# Altium PCB Beethoven-Clock_LED-PCB.PcbDoc
Units mm, origin at the board's own origin, x right, y up, seen from the top; angles counter-clockwise.
Board outline 19.1 x 12.2 mm, 2 copper layers (Top Layer, Bottom Layer); 24 components, 41 nets, 110 pads, 38 vias.
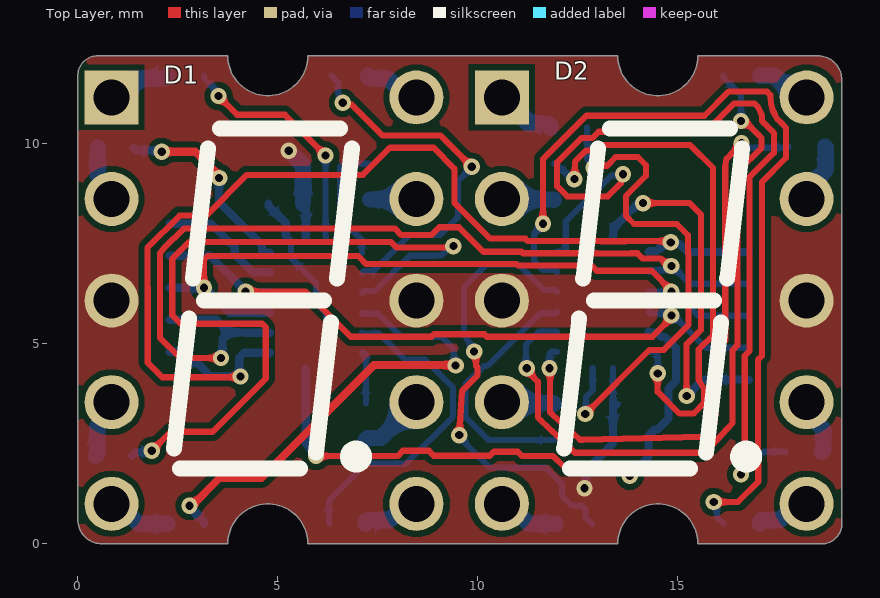
[diagram p0: Top Layer view]
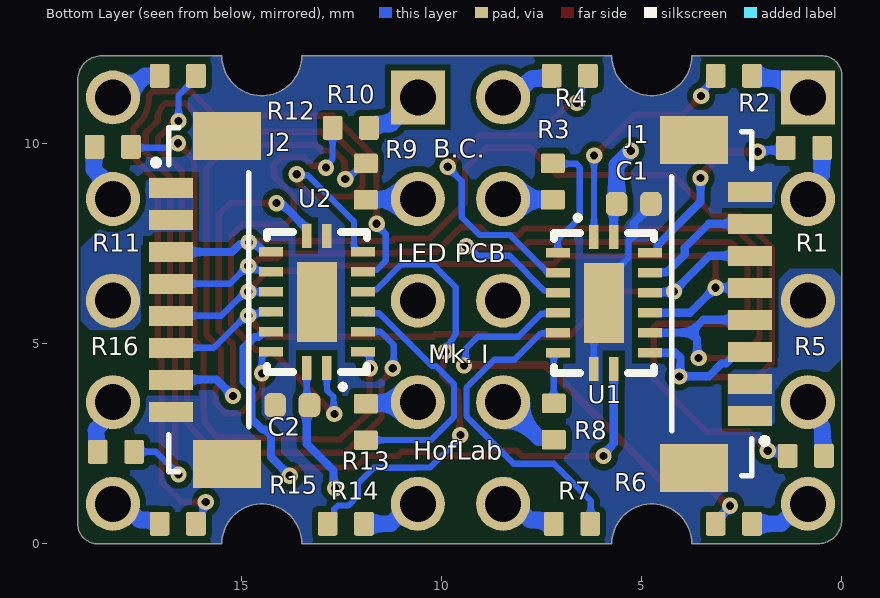
[diagram p1: Bottom Layer view, seen from below]
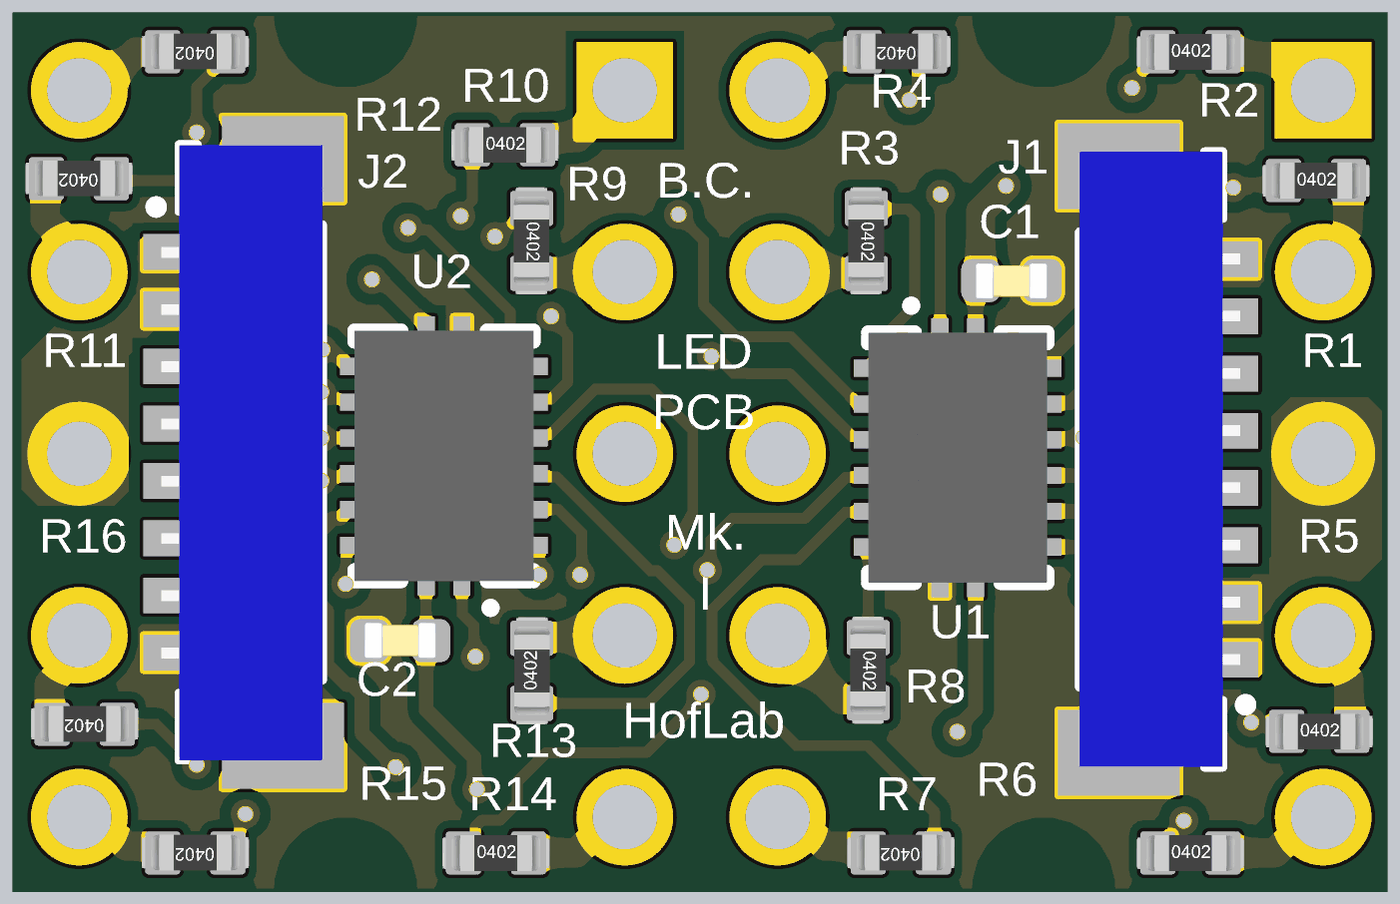
[diagram p2: 3D render of the assembled board from below, using the file's embedded part models]

## Layer stack, top to bottom
Top Solder: solder mask 0.0102, Solder Resist, Dk 3.5
Top Layer: signal copper 0.0356
Dielectric 1: dielectric 0.32, FR-4, Dk 4.8
Bottom Layer: signal copper 0.0356
Bottom Solder: solder mask 0.0102, Solder Resist, Dk 3.5

## Board outline
0.6,0 3.75,0 cw(c4.75,0) 5.75,0 13.5,0 cw(c14.5,0) 15.5,0 18.6,0 ccw(c18.6,0.5) 19.1,0.5 19.1,11.6 ccw(c18.5,11.6) 18.5,12.2 15.5,12.2 cw(c14.5,12.2) 13.5,12.2 5.75,12.2 cw(c4.75,12.2) 3.75,12.2 0.5,12.2 ccw(c0.5,11.7) 0,11.7 0,0.6 ccw(c0.6,0.6)

## Design rules (kind name [scope] priority, off if disabled: settings)
Clearance [All] p1: gap=0.152 ignorepadtopadclearanceinfootprint=FALSE except(0: Arc-Hole Track-Hole SMDPad-Hole THPad-Hole Via-Hole Fill-Hole Poly-Hole Region-Hole Text-Hole; 0.22: SMDPad-SMDPad SMDPad-THPad THPad-THPad)
MinimumSolderMaskSliver [All] p1: minsoldermaskwidth=0.12
PolygonConnect [All] p1: connectstyle=Direct reliefconductorwidth=0.254 reliefentries=4 polygonreliefangle="90 Angle" airgapwidth=0.152
RoutingVias [All] p1: holewidth=0.203 width=0.406 viastyle="Through Hole" minholewidth=0.203 minwidth=0.406 maxholewidth=0.711 maxwidth=1.27
SilkToSolderMaskClearance [IsPad] p1: minsilkscreentomaskgap=0.102 clearancetoexposedcopper=TRUE
SolderMaskExpansion Vias [IsVia] p1: expansion=0.102 istentingtop=TRUE
SolderMaskExpansion SolderMaskExpansion_1 [All] p2: expansion=0.051 istentingtop=FALSE
Width [All] p1: maxlimit=0.406 minlimit=0.152 preferedwidth=0.203 minimp=50.000000 maximp=50.000000 favimp=50.000000
28 further rules are at their usual default settings.

## Components (designator, comment, footprint, x,y, rotation, side; value= is the part's Value field where it differs from the comment)
C1 "CAP" 0402C 5.2,8.5 r180 bottom
C2 "CAP" 0402C 13.737,3.466 r0 bottom
D1 "HDSP-301E" 10-DIP_7SEG 4.655,6.08 r0 top locked
D2 "HDSP-301E" 10-DIP_7SEG 14.41,6.08 r0 top locked
J1 "BM08B-SURS-TF" JST_BM08B-SURS-TF(LF)(SN) 3,6 r90 bottom
J2 "BM08B-SURS-TF" JST_BM08B-SURS-TF(LF)(SN) 16.075,6.1 r270 bottom locked
R1 "RES" 0402R 0.945,9.9 r180 bottom value=383
R2 "RES" 0402R 2.7,11.7 r180 bottom value=383
R3 "RES" 0402R 7.225,9.055 r270 bottom value=383
R4 "RES" 0402R 6.8,11.7 r0 bottom value=383
R5 "RES" 0402R 0.9,2.2 r180 bottom value=383
R6 "RES" 0402R 2.7,0.5 r180 bottom value=383
R7 "RES" 0402R 6.745,0.5 r0 bottom value=383
R8 "RES" 0402R 7.2,3.055 r270 bottom value=383
R9 "RES" 0402R 11.9,9.055 r270 bottom value=383
R10 "RES" 0402R 12.275,10.4 r180 bottom value=383
R11 "RES" 0402R 18.225,9.925 r0 bottom value=383
R12 "RES" 0402R 16.6,11.7 r0 bottom value=383
R13 "RES" 0402R 11.9,3.045 r90 bottom value=383
R14 "RES" 0402R 12.4,0.5 r180 bottom value=383
R15 "RES" 0402R 16.6,0.5 r0 bottom value=383
R16 "RES" 0402R 18.145,2.3 r0 bottom value=383
U1 "74HC595TBQ,115" 16-VFQN-EP 5.95,6.025 r270 bottom locked
U2 "74HC595TBQ,115" 16-VFQN-EP 13.125,6.05 r90 bottom locked

## Footprints (in the part's own frame and the unit in brackets; to place one, negate y for a bottom-side part, rotate by r counter-clockwise, add the part's x,y. Pads: shape width x height; smd on the part's side, far side on the other; paste and mask are expansions set on the pad)
10-DIP_7SEG [mm]
  rect 1.35x1.35 / inner round 1.35 / far side rect 1.35x1.35 hole 0.9: 1(-3.81,5.08)
  round 1.35 hole 0.9: 2(-3.81,2.54) 3(-3.81,0) 4(-3.81,-2.54) 5(-3.81,-5.08) 6(3.81,-5.08) 7(3.81,-2.54) 8(3.81,0) 9(3.81,2.54) 10(3.81,5.08)
  silkscreen extent -2.25,-4.2 2.5,4.3, body extent -4.85,-6.4 4.85,6.4, height 6.4
16-VFQN-EP [mm]
  rect 0.6x0.24 smd mask+0.051: 1(-1.65,-0.25) 8(1.65,-0.25) 9(1.65,0.25) 16(-1.65,0.25)
  rect 0.24x0.6 smd mask+0.051: 2(-1.25,-1.15) 3(-0.75,-1.15) 4(-0.25,-1.15) 5(0.25,-1.15) 6(0.75,-1.15) 7(1.25,-1.15) 10(1.25,1.15) 11(0.75,1.15) 12(0.25,1.15) 13(-0.25,1.15) 14(-0.75,1.15) 15(-1.25,1.15)
  rect 2x1 smd mask+0.051: 17(0,0)
  silkscreen extent -2.18,-1.25 1.75,1.25, body extent -1.75,-1.25 1.75,1.25, height 0.85
0402C [mm] "0402 SMT Capacitor"
  rrect53% 0.54x0.6 smd: 1(-0.43,0) 2(0.43,0)
  body extent -0.5,-0.25 0.5,0.25, height 0.5
0402R [mm] "0402 SMT Resistor"
  rrect20% 0.49x0.6 smd: 1(-0.455,0) 2(0.455,0)
  body extent -0.75,-0.25 0.75,0.25, height 0.35
JST_BM08B-SURS-TF(LF)(SN) [mm]
  rect 0.5x1.1 smd mask+0.05: 1(-2.8,-0.7) 2(-2,-0.7) 3(-1.2,-0.7) 4(-0.4,-0.7) 5(0.4,-0.7) 6(1.2,-0.7) 7(2,-0.7) 8(2.8,-0.7)
  rect 1.2x1.7 smd mask+0.05: SH(-4.1,0.7) SH(4.1,0.7)
  silkscreen extent -4.3,-1.12 4.3,1.25, body extent -4.3,-1 4.3,1.25, height 2.75

## Part data
C1 C2: "Capacitor", Type=SMD
D1 D2: library part "7SEG SINGLE TH", "DISPLAY 7-SEG 0.4\" SGL RED 10DIP", MFR="Broadcom Limited", MFR PN=HDSP-301E, Type=TH
J1 J2: library part "CONN 8POS 0.8MM PITCH", "CONN HEADER SMD 8POS 0.8MM", MFR=JST, MFR PN=BM08B-SURS-TF, Type=SMD
R1 R2 R3 R4 R5 R6 R7 R8 R9 R10 R11 R12 R13 R14 R15 R16: "Resistor", MFR=YAGEO, MFR PN=RC0402FR-07383RL
U1 U2: library part "SHIFT REG 8BIT QFN", "IC 8BIT SHIFT REGISTER 16-DHVQFN", MFR="Nexperia USA Inc.", MFR PN=74HCT595BQ,115, Package=QFN, Type=SMD

## Via types
v1: diameter 0.406, hole 0.203, Top Layer to Bottom Layer, tented both sides, 38 vias

## Nets (pads, with @x,y where several pads share a name; then routed paths per layer and width w, separated by ;. In a path a pad name is that pad's centre, name@x,y a point inside that pad or via, vN(x,y) a via of type N, cw(c..) or ccw(c..) an arc to the next point about the centre after c; other vN are vias at no path point)
DIG1_A: D1.10 R4.2 | length 1.4
  Bottom Layer w0.406: R4.2 7.255,11.676 7.297,11.635 7.755,11.635 8.23,11.16 D1.10
DIG1_B: D1.9 R3.2 | length 1.2
  Bottom Layer w0.254: R3.2@7.3,8.6 R3.2@7.31,8.61 ; D1.9@8.455,8.61 D1.9
  Bottom Layer w0.406: R3.2@7.31,8.61 D1.9@8.455,8.61
DIG1_C: D1.7 R8.2 | length 1.7
  Bottom Layer w0.406: R8.2 7.242,2.642 7.567,2.642 D1.7
DIG1_D: D1.5 R6.2 | length 1.6
  Bottom Layer w0.406: D1.5 1.019,1 1.519,0.5 R6.2
DIG1_DP: D1.6 R7.2 | length 1.5
  Bottom Layer w0.406: R7.2 7.2,0.555 7.242,0.597 7.806,0.597 8.21,1 D1.6
DIG1_E: D1.4 R5.2 | length 1.5
  Bottom Layer w0.406: R5.2 0.487,2.242 0.487,2.926 0.845,3.285 D1.4
DIG1_F: D1.2 R1.2 | length 1.4
  Bottom Layer w0.406: R1.2 0.5,9.89 0.5,9.22 0.845,8.875 D1.2
DIG1_G: D1.1 R2.2 | length 1.6
  Bottom Layer w0.406: D1.1 1.317,11.632 2.203,11.632 2.245,11.674 R2.2
DIG2_A: D2.10 R12.2 | length 1.4
  Bottom Layer w0.406: R12.2 17.425,11.7 17.965,11.16 D2.10
DIG2_B: D2.9 R11.2 | length 1.5
  Bottom Layer w0.406: D2.9 18.22,8.875 18.7,9.355 18.7,9.905 R11.2
DIG2_C: D2.7 R16.2 | length 1.4
  Bottom Layer w0.406: D2.7 18.22,3.285 18.642,2.863 18.642,2.342 R16.2
DIG2_D: D2.5 R14.2 | length 1.6
  Bottom Layer w0.406: D2.5 10.774,1 11.274,0.5 R14.2
DIG2_DP: D2.6 R15.2 | length 1.4
  Bottom Layer w0.406: R15.2 17.055,0.555 17.097,0.597 17.561,0.597 17.965,1 D2.6
DIG2_E: D2.4 R13.2 | length 1.3
  Bottom Layer w0.406: D2.4 10.62,3.52 11.88,3.52 R13.2
DIG2_F: D2.2 R9.2 | length 1.3
  Bottom Layer w0.406: D2.2 10.61,8.61 11.89,8.61 R9.2
DIG2_G: D2.1 R10.2 | length 1.6
  Bottom Layer w0.406: D2.1 11.263,10.497 11.778,10.497 11.82,10.455 R10.2
GND: C1.2 C2.2 J1.8 J1.SH J2.8 J2.SH U1.8 U1.17 U2.8 U2.17 | length 4.7
  Bottom Layer w0.152: 5.2,7.7 5.329,7.571 5.329,7.146 5.95,6.525 U1.17 6.2,5.775 U1.8
  Bottom Layer w0.203: C1.2 4.77,8.448 5.2,8.018 5.2,7.7
NetJ2_7: J2.7 U2.9 | length 9.2
  Top Layer w0.153: v1(14.132,8.516) 15.294,8.516 15.576,8.235 15.576,5.344 15.494,5.262 15.297,5.065 15.263,5.032 15.219,4.987 15.219,3.969 v1(15.222,3.692)
  Bottom Layer w0.203: U2.9 13.393,7.718 13.393,7.898 13.972,8.477 14.093,8.477 v1(14.132,8.516) ; v1(15.222,3.692) 15.633,4.103 16.772,4.103 J2.7
NetR1_1: R1.1 U1.15 | length 5.2
  Top Layer w0.203: v1(2.1,9.8) 2.937,9.8 3.207,9.53 3.207,9.526 3.534,9.2 v1(3.534,9.145)
  Bottom Layer w0.203: R1.1 1.461,9.839 2.061,9.839 v1(2.1,9.8) v1@1.9,9.8 ; v1(3.534,9.145) 3.534,8.541 4.602,7.473 4.602,7.293 4.62,7.275 U1.15
NetR2_1: R2.1 U1.1 | length 5.9
  Top Layer w0.152: v1(3.516,11.192) 3.983,10.725 5.175,10.725 6.191,9.709 v1(6.191,9.705)
  Bottom Layer w0.152: R2.1 3.155,11.645 v1@3.5,11.3 ; v1(6.191,9.705) 6.195,9.7 6.195,7.68 U1.1
NetR3_1: R3.1 U1.2 | length 3.1
  Bottom Layer w0.152: U1.2 7.1,7.6 6.55,8.15 6.55,9.411 6.639,9.5 7.265,9.5 R3.1@7.275,9.51
NetR4_1: R4.1 U1.3 | length 9
  Top Layer w0.152: v1(6.625,11.025) 6.674,10.976 6.849,10.976 7.62,10.205 9.07,10.205 v1(9.85,9.425)
  Bottom Layer w0.152: R4.1 6.514,11.531 6.514,11.205 6.625,11.094 v1(6.625,11.025) ; U1.3 7.144,6.819 7.387,6.819 8.285,7.716 9.053,7.716 9.5,8.163 9.5,9.061 v1@9.85,9.411
NetR5_1: R5.1 U1.4 | length 19.3
  Top Layer w0.153: v1(1.85,2.325) 2.324,2.8 3.372,2.8 4.7,4.128 4.7,5.41 4.61,5.5 2.575,5.5 2.36,5.715 2.36,7.122 2.786,7.547 7.827,7.547 7.964,7.411 9.358,7.411 v1(9.389,7.441)
  Bottom Layer w0.152: U1.4 7.144,6.319 7.421,6.319 8.302,7.2 8.9,7.2 8.906,7.206 9.085,7.206 9.32,7.441 v1(9.389,7.441)
  Bottom Layer w0.203: R5.1 1.442,2.287 1.811,2.287 v1(1.85,2.325)
NetR6_1: R6.1 U1.5 | length 11.8
  Top Layer w0.203: v1(2.793,0.949) 2.848,0.949 3.549,1.65 4.588,1.65 7.407,4.469 9.432,4.469 v1(9.447,4.454)
  Bottom Layer w0.152: U1.5 7.125,5.75 7.514,5.75 8.087,5.176 9.098,5.176 9.398,4.876 9.398,4.503 v1(9.447,4.454)
  Bottom Layer w0.203: v1(2.793,0.949) 2.793,0.917 3.155,0.555 R6.1
NetR7_1: R7.1 U1.6 | length 8.1
  Bottom Layer w0.152: R7.1 6.275,0.515 6.275,1.075 7.2,2 8.203,2 9.369,3.166 9.369,3.194 9.383,3.209 9.383,3.9 8.683,4.6 8.185,4.6 7.524,5.261 7.114,5.261 U1.6
NetR8_1: R8.1 U1.7 | length 1.3
  Bottom Layer w0.152: U1.7 7.156,4.775 7.2,4.731 R8.1
NetR9_1: R9.1 U2.15 | length 13.7
  Top Layer w0.152: v1(12.414,9.115) 12.426,9.128 12.426,9.547 12.714,9.835 13.02,9.835 13.159,9.974 15.301,9.974 15.881,9.394 15.881,5.218 15.524,4.861 15.524,4.096 15.654,3.871 15.654,3.513 15.397,3.257 15.04,3.257 14.497,3.799 v1(14.497,4.261)
  Bottom Layer w0.152: R9.1 11.955,9.51 12.35,9.115 v1(12.414,9.115) ; U2.15 14.453,4.8 14.497,4.756 v1(14.497,4.261)
NetR10_1: R10.1 U2.1 | length 12.8
  Top Layer w0.152: v1(12.686,3.244) 14.292,4.849 14.649,4.849 15.271,5.471 15.271,7.237 15.255,7.253 15.255,7.714 14.974,7.995 13.905,7.995 13.7,8.2 13.7,8.695 14.2,9.195 14.2,9.469 14,9.669 13.448,9.669 13.231,9.452 12.941,9.452 v1(12.893,9.403)
  Bottom Layer w0.152: v1(12.686,3.244) 12.707,3.264 12.707,3.675 12.872,3.841 U2.1@12.872,4.397 ; R10.1 12.73,9.62 12.893,9.457 v1(12.893,9.403)
NetR11_1: R11.1 U2.2 | length 14.7
  Top Layer w0.152: v1(11.795,4.388) 11.808,4.375 11.808,3.287 11.855,3.24 12.555,2.6 12.616,2.6 12.618,2.6 15.627,2.676 15.676,2.725 15.681,2.731 15.921,3.026 15.959,3.387 15.959,3.997 15.955,4.729 15.955,4.855 16,4.9 16.186,5.086 16.186,9.423 16.222,9.628 v1(16.592,10.013)
  Bottom Layer w0.152: v1(11.795,4.388) 11.795,4.756 11.838,4.8 U2.2 ; v1(16.592,10.013) 16.661,10.013 16.774,9.9 17.745,9.9 R11.1
NetR12_1: R12.1 U2.3 | length 17.8
  Top Layer w0.152: v1(11.225,4.388) 11.225,4.335 11.504,4.056 11.504,3.22 11.504,3.157 11.593,3.068 11.729,2.935 12.425,2.275 12.488,2.275 15.563,2.275 15.626,2.275 15.797,2.414 15.981,2.599 16.369,3.018 16.369,4.838 16.49,4.959 16.49,9.296 17.096,9.902 17.096,10.144 17.013,10.227 16.76,10.48 16.74,10.48 16.649,10.572 v1(16.58,10.572)
  Bottom Layer w0.152: v1(11.225,4.388) 11.2,4.413 11.2,4.971 11.529,5.3 U2.3 ; R12.1 16.145,11.645 16.58,11.21 v1(16.58,10.572)
NetR13_1: R13.1 U2.4 | length 6.3
  Bottom Layer w0.152: R13.1 10.272,2.59 9.696,3.166 9.696,3.996 10.144,4.444 10.241,4.444 10.8,5.002 11.554,5.756 11.931,5.756 U2.4
NetR14_1: R14.1 U2.5 | length 11.4
  Top Layer w0.152: v1(9.535,2.716) 9.6,3.818 9.645,3.863 9.996,4.214 9.996,4.411 9.957,4.45 9.957,4.757 v1(9.908,4.806)
  Bottom Layer w0.152: v1(9.535,2.716) 9.78,2.42 9.869,2.331 10.296,1.904 10.677,1.904 10.681,1.9 11.7,1.9 12.1,1.5 12.1,1.2 12.344,0.956 12.598,0.956 12.687,0.867 12.687,0.668 R14.1 ; v1(9.908,4.806) 9.651,5.26 9.651,6.409 10.226,6.984 11.016,6.984 11.656,6.344 11.931,6.344 U2.5
NetR15_1: R15.1 U2.6 | length 21.8
  Top Layer w0.152: v1(11.629,8) 11.629,9.612 12.717,10.7 15.667,10.7 16.275,11.308 17.227,11.308 17.316,11.219 17.316,11.16 ccw(c18.22,11.16) 17.43,10.721 17.492,10.61 17.581,10.521 17.705,10.397 17.705,9.649 17.1,9.044 17.1,4.695 17.003,4.597 17.003,2.008 17.012,1.999 17.012,1.554 16.503,1.045 v1(15.9,1.045)
  Bottom Layer w0.152: v1(11.629,8) 11.629,7.969 11.4,7.74 11.4,7.076 11.632,6.844 11.931,6.844 U2.6 ; v1(15.9,1.045) 15.9,0.976 15.976,0.9 15.976,0.669 R15.1
NetR16_1: R16.1 U2.7 | length 22.2
  Top Layer w0.152: v1(13.627,9.238) 13.578,9.189 13.578,9.009 13.491,8.922 13.254,8.685 12.594,8.685 12.593,8.684 12.235,8.684 11.982,8.937 11.982,9.534 12.588,10.14 12.859,10.14 13.019,10.3 15.698,10.3 16.401,11.003 16.92,11.003 17.009,10.915 17.079,10.761 ccw(c18.22,11.16) 17.1,10.706 17.1,10.571 17.145,10.526 17.4,10.271 17.4,9.775 16.795,9.17 16.795,4.821 16.674,4.7 16.674,1.895 16.58,1.802 v1(16.58,1.733)
  Bottom Layer w0.152: U2.7 12.155,7.3 12.199,7.344 12.199,8.059 13.349,9.209 13.599,9.209 v1(13.627,9.238) ; v1(16.58,1.733) 17.147,2.3 R16.1
NetU1_9: U1.9 U2.14 | length 15.1
  Top Layer w0.153: v1(5.956,2.194) 7.994,2.194 8.125,2.325 8.775,2.325 8.9,2.2 10.3,2.2 10.4,2.3 11,2.3 11.106,2.194 11.881,2.194 12.168,1.907 13.584,1.907 13.783,1.708 v1@13.792,1.708
  Bottom Layer w0.203: U1.9 5.7,2.505 5.956,2.249 v1(5.956,2.194) ; v1(13.8,1.7) 14.271,2.171 14.271,2.705 14.42,2.854 14.488,2.854 14.765,3.131 14.765,3.882 14.954,4.071 14.954,4.9 14.68,5.174 14.581,5.174 14.473,5.282 14.293,5.282 U2.14
SHIFT_DATA_CLK: J1.4 J2.4 U1.11 U2.11 | length 23.4
  Top Layer w0.153: v1(3.578,4.644) 2.556,4.644 2.054,5.146 2.054,7.27 2.142,7.371 2.657,7.887 7.92,7.887 8.091,7.716 8.839,7.716 9.037,7.913 9.527,7.913 10.139,7.302 11.088,7.302 11.127,7.263 12.963,7.263 12.968,7.258 13.832,7.258 13.837,7.263 13.989,7.263 14.121,7.131 14.57,7.131 14.671,7.03 14.705,7.03 14.793,6.942 v1(14.839,6.942)
  Bottom Layer w0.152: U2.11 14.319,6.844 v1@14.692,6.844 ; v1@14.85,6.955 15.304,6.5 J2.4
  Bottom Layer w0.203: J1.4 3.464,5.6 3.782,5.282 ; v1(3.578,4.644) 3.617,4.683 3.617,5.117 3.782,5.282 ; U1.11 4.195,5.275 4.188,5.282 3.782,5.282
SHIFT_DATA_IN: J1.7 U1.14 | length 3.1
  Bottom Layer w0.203: J1.7 3.325,8 3.925,7.4 3.925,7.235 4.366,6.793 4.782,6.793 U1.14
SHIFT_nMCLR: J1.3 J2.3 U1.10 U2.10 | length 27
  Top Layer w0.153: v1(4.064,4.184) 4.043,4.163 2.112,4.163 1.749,4.526 1.749,6.42 1.742,6.427 1.742,7.403 2.544,8.205 3.205,8.205 4.223,9.223 7.123,9.223 7.8,9.9 8.895,9.9 9.416,9.379 9.416,8.526 10.311,7.63 11.192,7.63 11.254,7.568 13.09,7.568 13.095,7.563 13.705,7.563 13.71,7.568 14.79,7.568 v1(14.823,7.535)
  Bottom Layer w0.203: J1.3 2.6,4.8 2.896,4.504 3.004,4.504 3.321,4.187 v1@4.035,4.187 ; v1@4.061,4.187 v1@4.035,4.187 ; U1.10 4.154,4.775 4.035,4.656 v1@4.035,4.187 ; U2.10 14.293,7.318 14.473,7.318 14.652,7.497 14.784,7.497 v1(14.823,7.535) 14.862,7.497 15.045,7.497 15.248,7.293 16.768,7.293 J2.3
SHIFT_nOE: J1.6 J2.6 U1.13 U2.13 | length 17.2
  Top Layer w0.153: v1(4.196,6.309) 5.691,6.309 6.824,5.176 8.839,5.176 8.901,5.238 10.164,5.238 10.226,5.176 14.365,5.176 14.839,5.649 v1(14.839,5.704)
  Bottom Layer w0.152: U2.13 14.319,5.756 14.773,5.756 14.825,5.704 v1@14.894,5.704 ; v1@14.9,5.7 15.7,4.9 J2.6
  Bottom Layer w0.203: J1.6 3.305,7.2 4.213,6.292 4.783,6.292 U1.13
SHIFT_STORE_CLK: J1.5 J2.5 U1.12 U2.12 | length 18.3
  Top Layer w0.153: v1(3.153,6.401) 3.153,7.105 3.243,7.195 7.005,7.195 7.203,6.997 10.962,6.997 11.001,6.957 12.837,6.957 12.968,6.826 14.344,6.826 14.839,6.331 v1(14.839,6.3)
  Bottom Layer w0.152: U2.12 14.912,6.3 15.512,5.7 J2.5
  Bottom Layer w0.203: J1.5@2.301,6.401 v1(3.153,6.401) ; v1(3.153,6.401) 3.166,6.401 3.792,5.775 U1.12
VCC: C1.1 C2.1 D1.3 D1.8 D2.3 D2.8 J1.1 J1.2 J2.1 J2.2 U1.16 U2.16 | length 5.6
  Bottom Layer w0.152: C2.1@13.377,3.622 U2.16@13.377,4.398 ; C2.1@13.46,3.444 C2.1@13.507,3.491
  Bottom Layer w0.203: U1.16 C1.1@5.7,8.42 ; v1(12.666,1.388) 12.705,1.427 12.705,1.83 13.377,2.502 C2.1@13.377,3.622
  Bottom Layer w0.406: v1(5.275,9.825) 5.63,9.47 C1.1

## Polygon pours and split planes (outlines as drawn)
GND on Bottom Layer "NONET_L01_P-001" (solid, remove dead copper, pour order 4): 0.599,-0.001 cw(c0.599,0.599) -0.001,0.599 -0.001,11.699 cw(c0.499,11.699) 0.499,12.199 3.749,12.199 ccw(c4.749,12.199) 5.749,12.199 13.499,12.199 ccw(c14.499,12.199) 15.499,12.199 18.499,12.199 cw(c18.499,11.599) 19.099,11.599 19.099,0.499 cw(c18.599,0.499) 18.599,-0.001 15.499,-0.001 ccw(c14.499,-0.001) 13.499,-0.001 5.749,-0.001 ccw(c4.749,-0.001) 3.749,-0.001
VCC on Bottom Layer "NONET_L01_P-001" (solid, pour order 3): 2.85,2.95 2.85,4.25 2.75,4.35 1.875,4.35 1.575,4.65 1.575,6.6 1.3,6.875 0.225,6.875 0.025,6.675 0.025,4.6 0.325,4.3 1.2,4.3 1.675,3.825 1.675,3.025 1.75,2.95
VCC on Bottom Layer "NONET_L01_P-001" (solid, pour order 2): 17.3,9.15 16.225,9.15 16.225,7.85 16.275,7.8 17.175,7.8 17.525,7.45 17.525,5.55 17.725,5.35 18.8,5.35 19.025,5.575 19.025,7.4 18.55,7.875 17.875,7.875 17.425,8.325 17.4,9.025 17.4,9.05
VCC on Top Layer "NONET_L01_P-001" (solid, remove dead copper, pour order 5): 0.599,-0.001 cw(c0.599,0.599) -0.001,0.599 -0.001,11.699 cw(c0.499,11.699) 0.499,12.199 3.749,12.199 ccw(c4.749,12.199) 5.749,12.199 13.499,12.199 ccw(c14.499,12.199) 15.499,12.199 18.499,12.199 cw(c18.499,11.599) 19.099,11.599 19.099,0.499 cw(c18.599,0.499) 18.599,-0.001 15.499,-0.001 ccw(c14.499,-0.001) 13.499,-0.001 5.749,-0.001 ccw(c4.749,-0.001) 3.749,-0.001

## Silkscreen, mask and mechanical layers (free items; w line width, h text height)
Bottom Overlay:
  text "B.C." at 10.213,9.485 h0.8
  text "LED PCB" at 11.112,6.877 h0.8
  text "Mk. I" at 10.344,4.352 h0.8
  text "HofLab" at 10.709,1.936 h0.8
Board Shape:
  the board outline again, w0.1